# Altium PCB PCB.PcbDoc
Units mm, origin at the board's own origin, x right, y up, seen from the top; angles counter-clockwise.
Board outline 71.43 x 50.9 mm, 2 copper layers (Top Layer, Bottom Layer); 47 components, 48 nets, 194 pads, 63 vias.
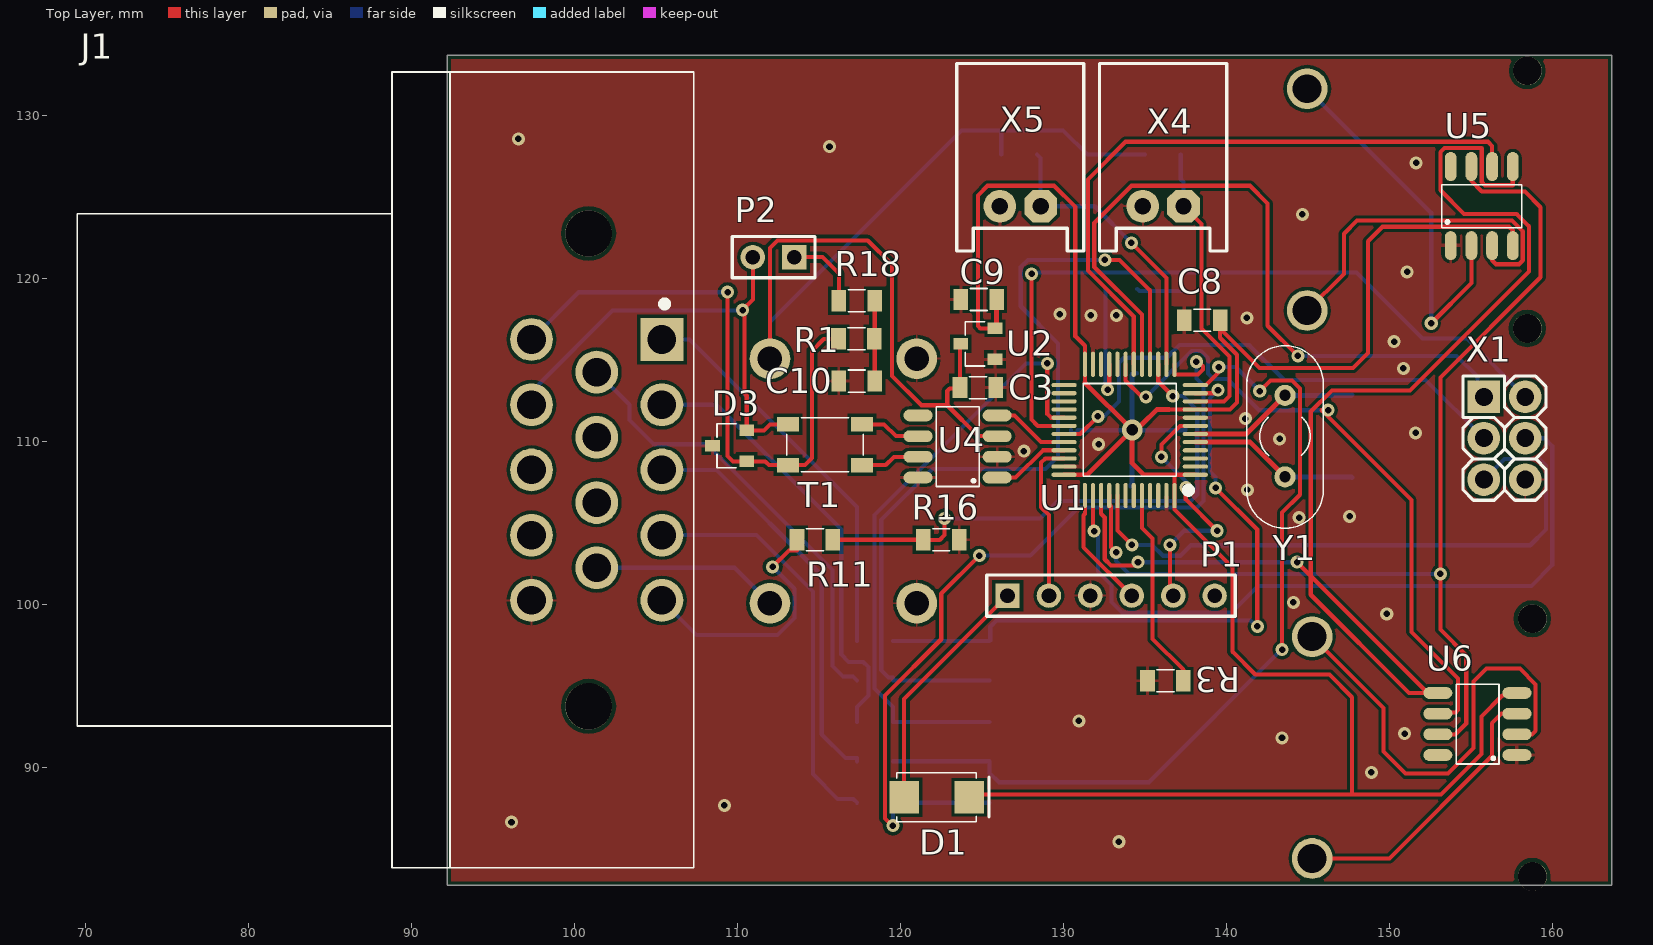
[diagram p0: Top Layer view]
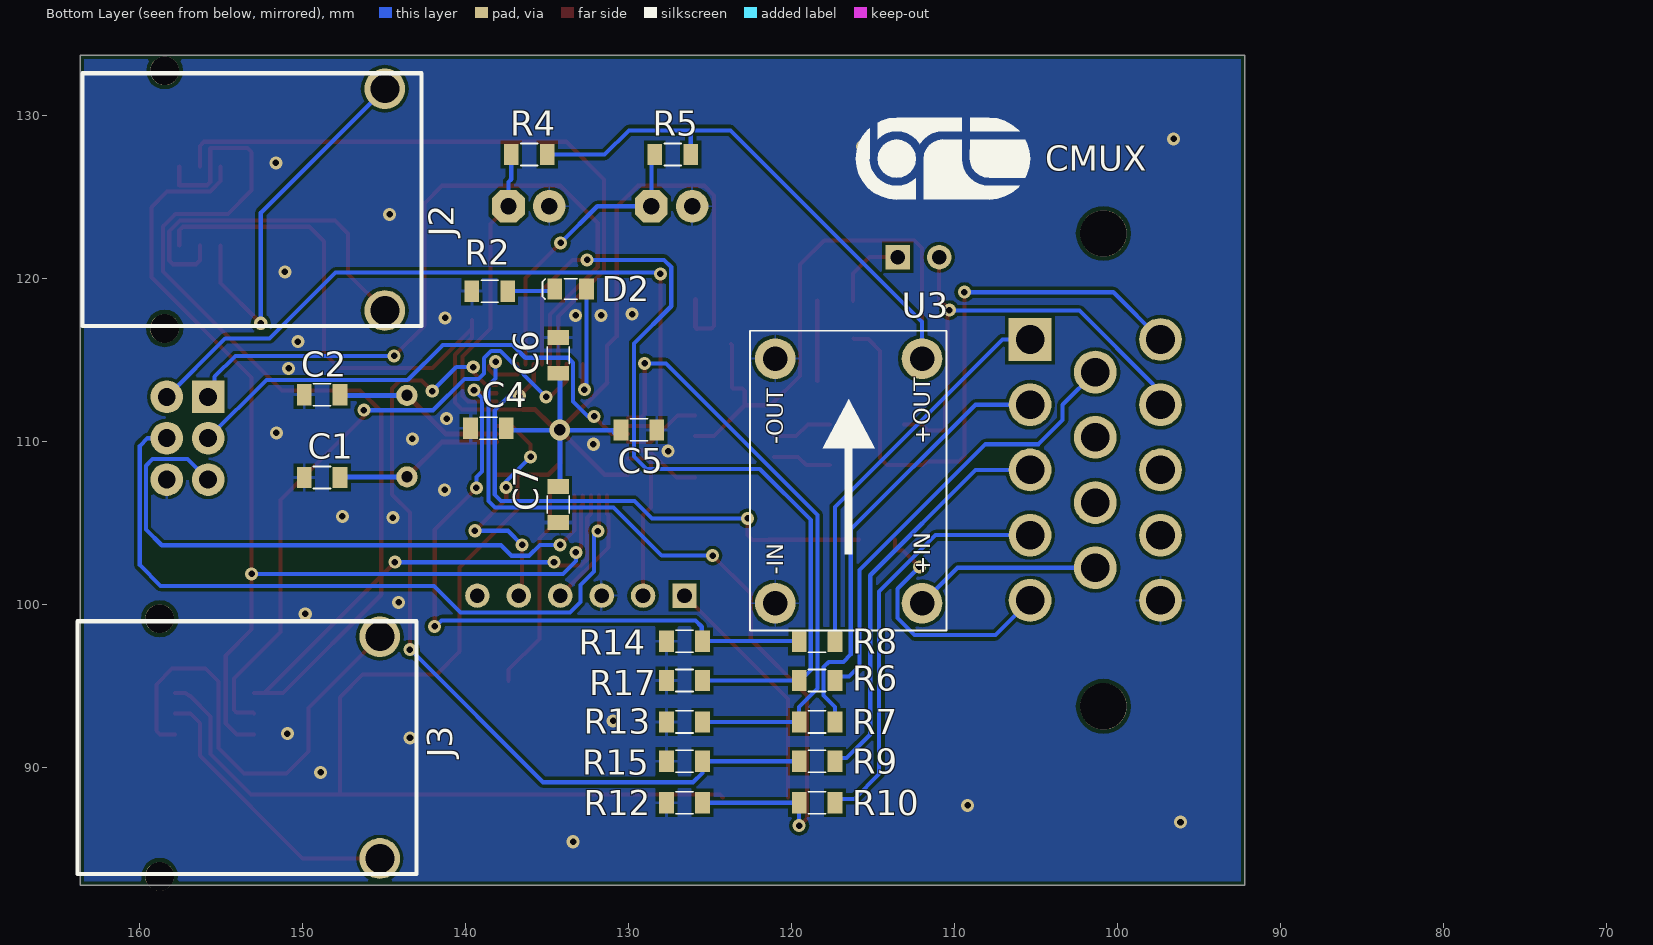
[diagram p1: Bottom Layer view, seen from below]

## Layer stack, top to bottom
Top Solder: solder mask 0.0102, Solder Resist, Dk 3.5
Top Layer: signal copper 0.0356
Dielectric 1: dielectric 0.32, FR-4, Dk 4.8
Bottom Layer: signal copper 0.0356
Bottom Solder: solder mask 0.0102, Solder Resist, Dk 3.5

## Board outline
92.2,82.775 92.2,133.675 163.625,133.675 163.625,82.775

## Design rules (kind name [scope] priority, off if disabled: settings)
AcuteAngle [All] p1: minimum=3.50000000000000E+0001 checktracksonly=FALSE
BoardOutlineClearance "BoardOutlineClearance 1" [All] p1: gap=0.25 ignorepadtopadclearanceinfootprint=FALSE except(0: Arc-SplitContinuation Track-SplitContinuation SMDPad-SplitContinuation THPad-SplitContinuation Via-SplitContinuation Fill-SplitContinuation Poly-SplitContinuation Region-SplitContinuation Text-SplitContinuation) // Milling
Clearance "Clearance-1 1/2 Oz" [All] p1: gap=0.125 ignorepadtopadclearanceinfootprint=FALSE except(0.2: Arc-Fill Arc-Poly Track-Fill Track-Poly SMDPad-SMDPad SMDPad-Fill SMDPad-Poly THPad-Fill THPad-Poly Via-Fill Via-Poly Fill-Fill Fill-Poly Poly-Poly Poly-Region Poly-Text; 0.25: Arc-Hole Track-Hole SMDPad-Hole THPad-Hole Via-Hole Fill-Hole Poly-Hole Region-Hole Text-Hole) // Standart
ComponentClearance [All] p1: gap=0.1 collisioncheckmode=3 verticalgap=0.25 showdistances=FALSE
DiffPairsRouting "DiffPairsRouting 1/2 Oz" [All] p1: maxlimit=0.254 minlimit=0.125 mostfreqgap=0.254 toplayer_minwidth=0.125 toplayer_maxwidth=0.381 toplayer_prefwidth=0.381 bottomlayer_minwidth=0.125 bottomlayer_maxwidth=0.381 bottomlayer_prefwidth=0.381 maxuncoupledlength=12.7
Height [All] p1: minheight=0 maxheight=100 prefheight=12.7
HoleSize "Minimum HoleSize" [IsPad] p1: absolutevalues=TRUE maxlimit=5.9 minlimit=0.6 maxpercent=80.000 minpercent=20.000
HoleSize "Minimum HoleSize VIA 1" [IsVia] p2: absolutevalues=TRUE maxlimit=5.9 minlimit=0.3 maxpercent=80.000 minpercent=20.000 // Standart
HoleToHoleClearance Hole2HoleClearance [All] p1: gap=0.25 allowstackedmicrovias=FALSE
MinimumAnnularRing "Minimum AR VIA Standart" [All] p1: minimumring=0.15
MinimumAnnularRing "Minimum AR PAD Standart" [All] p2: minimumring=0.2
MinimumSolderMaskSliver "SolderMask Bridge Standart" [All] p1: minsoldermaskwidth=0.15 // All Masks
PlaneClearance "PlaneClearance-1 1/2 Oz" [All] p1: clearance=0.2 // Standart
PlaneConnect "TermalConnect-1 1/2 Oz" [All] p1: planeconnectstyle=Relief reliefexpansion=0.2 reliefentries=4 reliefconductorwidth=0.2 reliefairgap=0.2 // Standart
PolygonConnect "PolygonConnect-1 1/2 Oz" [All] p1: thpad.connectstyle=Relief thpad.reliefconductorwidth=0.15 thpad.reliefentries=4 thpad.polygonreliefangle="90 Angle" thpad.airgapwidth=0.2 smdpad.connectstyle=Relief smdpad.reliefconductorwidth=0.2 smdpad.reliefentries=4 smdpad.polygonreliefangle="90 Angle" smdpad.airgapwidth=0.2 via.connectstyle=Direct via.reliefconductorwidth=0.254 via.reliefentries=4 via.polygonreliefangle="90 Angle" via.airgapwidth=0.254 // Standart
RoutingCorners [All] p1 off: cornerstyle=45-Degree minsetback=2.54 maxsetback=2.54
RoutingVias [All] p1: holewidth=0.4 width=0.8 viastyle="Through Hole" minholewidth=0.3 minwidth=0.6 maxholewidth=5.9 maxwidth=8.9
SilkToSilkClearance Silk2SilkClearance [All] p1 off: silktosilkclearance=0.15
SilkToSolderMaskClearance Silk2SolderMaskClearance [IsPad] p1 off: minsilkscreentomaskgap=0.15 clearancetoexposedcopper=TRUE
SolderMaskExpansion SolderMaskExpansion-1 [All] p1: expansion=0.05 istentingtop=FALSE // Standart
UnRoutedNet [All] p1: checkbadconnections=TRUE
Width "Width 1/2 Oz" [All] p1: maxlimit=10 minlimit=0.125 preferedwidth=0.254 checkconnectedcopper=TRUE
18 further rules are at their usual default settings.

## Classes and differential pairs
component class "Power and can": C3 C4 C5 C6 C7 C8 C9 C10 D3 J2 J3 P2 R1 R18 T1 U2 U3 U4 U5 U6
component class "STM and connectors": C1 C2 D1 D2 J1 P1 R2 R3 R4 R5 R6 R7 R8 R9 R10 R11 R12 R13 R14 R15 R16 R17 U1 X1 X4 X5 Y1

## Components (designator, comment, footprint, x,y, rotation, side; value= is the part's Value field where it differs from the comment)
C1 "10pF" "0805 Capicator" 148.792,107.783 r0 bottom
C2 "10pF" "0805 Capicator" 148.792,112.863 r0 bottom
C3 "1uF" "0805 Capicator" 124.75,113.3 r180 top
C4 "0.1uF" "0805 Capicator" 138.589,110.81 r0 bottom
C5 "0.1uF" "0805 Capicator" 129.361,110.704 r180 bottom
C6 "0.1uF" "0805 Capicator" 134.314,115.276 r90 bottom
C7 "0.1uF" "0805 Capicator" 134.314,106.132 r270 bottom
C8 "4.7uF" "0805 Capicator" 138.505,117.435 r0 top
C9 "1uF" "0805 Capicator" 124.8,118.7 r180 top
C10 "4.7uF" "0805 Capicator" 117.325,113.7 r0 top
D1 "Diode" SMA 122.225,88.175 r0 top
D2 "LedG" "0805 LED" 133.552,119.34 r0 bottom
D3 "TVS" SOT-23 110.575,108.775 r90 top
J1 "Connector" "AMP 776266-1" 105.436,116.231 r270 top
J2 "PCC-SMP-K" thermocouple 142.444,124.827 r90 bottom
J3 "PCC-SMP-K" thermocouple 142.75,91.225 r90 bottom
P1 "Header 6" HDR1X6 126.567,100.544 r0 top
P2 "Header 2" HDR1X2 113.49,121.3 r180 top
R1 "62R" "0805 Resistor" 117.3,116.3 r180 top
R2 "430R" "0805 Resistor" 138.505,119.213 r0 bottom
R3 "1k" "0805 Resistor" 136.25,95.325 r180 top
R4 "1k" "0805 Resistor" 136.092,127.595 r180 bottom
R5 "1k" "0805 Resistor" 127.286,127.595 r180 bottom
R6 "1k" "0805 Resistor" 118.439,95.337 r180 bottom
R7 "1k" "0805 Resistor" 118.439,92.797 r180 bottom
R8 "1k" "0805 Resistor" 118.439,97.75 r180 bottom
R9 "1k" "0805 Resistor" 118.439,90.384 r180 bottom
R10 "1k" "0805 Resistor" 118.439,87.844 r180 bottom
R11 "1k" "0805 Resistor" 114.756,103.973 r180 top
R12 "2k4" "0805 Resistor" 126.567,87.844 r0 bottom
R13 "2k4" "0805 Resistor" 126.567,92.797 r0 bottom
R14 "2k4" "0805 Resistor" 126.567,97.75 r0 bottom
R15 "2k4" "0805 Resistor" 126.567,90.384 r0 bottom
R16 "2k4" "0805 Resistor" 122.503,103.973 r0 top
R17 "2k4" "0805 Resistor" 126.567,95.337 r0 bottom
R18 "62R" "0805 Resistor" 117.325,118.625 r0 top
T1 "ACT45B" ACT45B 118.33,111.045 r180 top
U1 "STM32F103C8T6" LQFP48 134.06,110.704 r180 top
U2 "LDO 3V" SOT-23 125.805,115.027 r90 top
U3 "DC/DC" DC-DC 116.5,107.575 r90 bottom
U4 "CAN_Rx/Tx" SO-8#1 125.932,107.783 r180 top
U5 "MAX31855KASA+" SO-8#2 153.725,122.066 r90 top
U6 "MAX31855KASA+" SO-8#2 157.75,90.745 r180 top
X1 "Connector, 6pin, 2.54mm, 500VAC, 3A" "CON: PLD-6" 157.047,110.196 r270 top
X4 "Connector, 2pin, 2.54mm, 250VAC, 3A" "CON: CWF-2R" 136.112,124.42 r180 top
X5 "Connector, 2pin, 2.54mm, 250VAC, 3A" "CON: CWF-2R" 127.349,124.42 r180 top
Y1 "8MHz" R38 143.585,110.323 r0 top

## Footprints (in the part's own frame and the unit in brackets; to place one, negate y for a bottom-side part, rotate by r counter-clockwise, add the part's x,y. Pads: shape width x height; smd on the part's side, far side on the other; paste and mask are expansions set on the pad)
"0805 Capicator" [mm]
  rect 0.9x1.3 smd: 1(-1.1,0) 2(1.1,0)
  silkscreen extent -0.53,-0.67 0.53,0.67, body extent -1.05,-0.67 1.05,0.68, height 0.75
"0805 LED" [mm]
  rect 0.9x1.3 smd: 1(-0.975,0) 2(0.975,0)
  silkscreen extent -0.4,-0.63 1.73,0.63, body extent -0.93,-0.62 1.09,0.63, height 1.1
"0805 Resistor" [mm]
  rect 0.9x1.3 smd: 1(-1.1,0) 2(1.1,0)
  silkscreen extent -0.53,-0.67 0.53,0.67, body extent -1.05,-0.67 1.05,0.68, height 0.6
ACT45B [mm]
  rect 1.35x0.9 smd: 1(0.675,2.5) 2(0.675,0) 3(5.225,0) 4(5.225,2.5)
  silkscreen extent 0.6,-0.4 5.3,2.9, body extent 0.7,-0.35 5.2,2.85, height 3
"AMP 776266-1" [mm]
  rect 2.625x2.625 hole 1.75: 1(-0.019,-0.061)
  round 2.625 hole 1.75: 2(3.981,-0.061) 3(7.981,-0.061) 4(11.981,-0.061) 5(15.981,-0.061) 6(1.981,-4.061) 7(5.981,-4.061) 8(9.981,-4.061) 9(13.981,-4.061) 10(-0.019,-8.061) 11(3.981,-8.061) 12(7.981,-8.061) 13(11.981,-8.061) 14(15.981,-8.061)
  round 2.85 hole 2.85 unplated: None(-6.519,-4.561) None(22.481,-4.561)
  silkscreen extent -16.42,-35.91 32.38,1.9, body extent -16.4,-35.9 32.4,1.9, height 29.05
"CON: CWF-2R" [mm]
  oct 2x2 hole 1: 1(-1.25,0)
  round 2 hole 1: 2(1.25,0)
  round 0.5 on Mech1: ""(-3.3,2.2)
  round 0.5 on Top Overlay: ""(-2.375,1.85)
  silkscreen extent -3.9,-8.75 3.9,2.75, body extent -3.75,-8.9 3.75,2.6, height 5.75
"CON: PLD-6" [mm]
  rect 2x2 hole 1.1: 1(-2.54,-1.27)
  round 2 hole 1.1: 2(-2.54,1.27) 3(0,-1.27) 4(0,1.27) 5(2.54,-1.27) 6(2.54,1.27)
  silkscreen extent -3.81,-2.54 3.81,2.54, body extent -3.81,-2.54 3.81,2.54, height 8.54
DC-DC [mm]
  round 2.5 / inner round 1.524 / far side round 2.5 hole 1.5: 1(-7.5,4.5) 2(-7.5,-4.5) 3(7.5,4.5) 4(7.5,-4.5)
  silkscreen extent -9.18,-6 9.2,6.05, body extent -9,-5.82 9,5.82, height 7.3
HDR1X2 [mm] "Connector; Header; 2 Position"
  rect 1.5x1.5 hole 0.9: 1(0,0)
  round 1.5 hole 0.9: 2(2.54,0)
  silkscreen extent -1.27,-1.27 3.81,1.27
HDR1X6 [mm] "Connector; Header; 6 Position"
  rect 1.5x1.5 hole 0.9: 1(0,0)
  round 1.5 hole 0.9: 2(2.54,0) 3(5.08,0) 4(7.62,0) 5(10.16,0) 6(12.7,0)
  silkscreen extent -1.27,-1.27 13.97,1.27
LQFP48 [mm]
  oval 1.55x0.254 smd mask+0.02: 1(-4.025,2.75) 2(-4.025,2.25) 3(-4.025,1.75) 4(-4.025,1.25) 5(-4.025,0.75) 6(-4.025,0.25) 7(-4.025,-0.25) 8(-4.025,-0.75) 9(-4.025,-1.25) 10(-4.025,-1.75) 11(-4.025,-2.25) 12(-4.025,-2.75) 25(4.025,-2.75) 26(4.025,-2.25) 27(4.025,-1.75) 28(4.025,-1.25) 29(4.025,-0.75) 30(4.025,-0.25) 31(4.025,0.25) 32(4.025,0.75) 33(4.025,1.25) 34(4.025,1.75) 35(4.025,2.25) 36(4.025,2.75)
  oval 0.254x1.55 smd mask+0.02: 13(-2.75,-4.025) 14(-2.25,-4.025) 15(-1.75,-4.025) 16(-1.25,-4.025) 17(-0.75,-4.025) 18(-0.25,-4.025) 19(0.25,-4.025) 20(0.75,-4.025) 21(1.25,-4.025) 22(1.75,-4.025) 23(2.25,-4.025) 24(2.75,-4.025) 37(2.75,4.025) 38(2.25,4.025) 39(1.75,4.025) 40(1.25,4.025) 41(0.75,4.025) 42(0.25,4.025) 43(-0.25,4.025) 44(-0.75,4.025) 45(-1.25,4.025) 46(-1.75,4.025) 47(-2.25,4.025) 48(-2.75,4.025)
  silkscreen extent -3.8,-2.85 2.85,3.9, body extent -4.5,-4.54 4.5,4.46, height 1.56
R38 [mm] "Crystal"
  round 1.3 hole 0.7: 1(0,2.5) 2(0,-2.5)
  silkscreen extent -2.35,-5.65 2.35,5.55, body extent -2.26,-5.56 2.24,5.44, height 4
SMA [mm]
  rect 1.8x2 smd: 1(-2,0) 2(2,0)
  silkscreen extent -2.45,-1.5 3.2,1.5, body extent -2.74,-1.4 2.74,1.4, height 2.29
SO-8#1 [mm]
  oval 1.78x0.72 smd: 1(0,0) 2(0,-1.27) 3(0,-2.54) 4(0,-3.81) 5(4.85,-3.81) 6(4.85,-2.54) 7(4.85,-1.27) 8(4.85,0)
  silkscreen extent 1.1,-4.35 3.72,0.55, body extent -0.45,-4.35 5.33,0.55, height 1.45
SO-8#2 [mm]
  oval 1.78x0.72 smd: 1(-0.059,-0.02) 2(-0.059,-1.29) 3(-0.059,-2.56) 4(-0.059,-3.83) 5(4.791,-3.83) 6(4.791,-2.56) 7(4.791,-1.29) 8(4.791,-0.02)
  silkscreen extent 1.04,-4.37 3.67,0.53, body extent -0.51,-4.37 5.27,0.53, height 1.45
SOT-23 [mm]
  rect 0.7x0.9 smd: 1(0,0) 2(1.9,0) 3(0.95,2.1)
  silkscreen extent -0.4,0.65 2.3,1.83, body extent -0.55,-0.17 2.45,2.23, height 1.1
thermocouple [mm]
  round 2.5 / inner round 1.524 / far side round 2.5 hole 1.77: +(-6.8,2.5) -(6.8,2.5)
  round 1.77 hole 1.77: ""(-7.9,16) ""(7.9,16)
  silkscreen extent -7.75,0.25 7.75,21.05, body extent -7.85,-0.02 7.85,20.78, height 7.47

## Part data
C1 C2: library part "Cap 10pF (0805)", "10pF NP0 50V 5% 0805", Manufacturer="Murata Manufacturing", Part Number=GRM2165C1H100JZ01D, ComponentLink1Description=Chip&Dip, ComponentLink1URL=https://www.chipdip.ru/product/grm2165c1h100j, Type=Capacitor
C3 C9: library part "Cap 1uF (0805)", "1uF X7R 10% 16V 0805", Manufacturer="Murata Manufacturing", Part Number=GRM21BR71C105KA01K, ComponentLink1Description=Chip&Dip, ComponentLink1URL=https://www.chipdip.ru/product/grm21br71c105k, Type=Capacitor
C4 C5 C6 C7: library part "Cap 0.1uF (0805)", "0.1uF X7R 50V 10% 0805", Manufacturer="Murata Manufacturing", Part Number=GRM21BR71H104K, ComponentLink1Description=Chip&Dip, ComponentLink1URL=https://www.chipdip.ru/product/grm21br71h104k, Type=Capacitor
C8 C10: library part "Cap 4.7uF (0805)", "4.7uF X5R 10% 25V 0805", Manufacturer="Murata Manufacturing", Part Number=GRM21BR61E475KA12L, ComponentLink1Description=Chip&Dip, ComponentLink1URL=https://www.chipdip.ru/product/grm21br61e475ka12l, Type=Capacitor
D1: library part "Diode Schottky (SMA)", "Diode Schottky 3A 40V", Manufacturer=Vishay, Part Number=B340A-E3/61T, ComponentLink1Description=DataSheet, ComponentLink1URL=https://static.chipdip.ru/lib/652/DOC001652710.pdf, ComponentLink2Description=Chip&Dip, ComponentLink2URL=https://www.chipdip.ru/product/b340a-e3-61t-2, Type=Diode
D2: library part "Led Green", "Led Green SMD 1608, 120°, 525nM", Manufacturer="Taiwan Oasis Technology", Part Number=TO-1608BC-PG, ComponentLink1Description=Chip&Dip, ComponentLink1URL=https://www.chipdip.ru/product/to-1608bc-pg, Type=Diode
D3: library part "TVS Diode Arrays", Manufacturer=Littelfuse, Part Number=SM24CANB-02HTG, ComponentLink1Description=DataSheet, ComponentLink1URL=https://m.littelfuse.com/~/media/electronics/datasheets/tvs_diode_arrays/littelfuse_tvs_diode_array_sm24canb_datasheet.pdf.pdf, ComponentLink2Description=Chip&Dip, ComponentLink2URL=https://www.chipdip.ru/product1/8001779022, Type=Diode
J1: library part "Connector AMP", "AMP Connector", Manufacturer="TE Connectivity", Part Number=776266-1, Type=Connector
J2 J3: library part thermocoupleconnector
P1: "Header, 6-Pin", LatestRevisionDate=17-Jul-2002, LatestRevisionNote="Re-released for DXP Platform.", Publisher="Altium Limited"
P2: "Header, 2-Pin", LatestRevisionDate=17-Jul-2002, LatestRevisionNote="Re-released for DXP Platform.", Publisher="Altium Limited"
R1 R18: library part "Res 62R (0805)", "0.125W 0805 62R, 1%", Manufacturer=Taiwan, Part Number=RC0805FR-0762RL, ComponentLink1Description=Chip&Dip, ComponentLink1URL=https://www.chipdip.ru/product0/9000079457, Type=Resistor
R2: library part "Res 430R (0805)", "0.125W 0805 430R, 1%", Manufacturer=Taiwan, Part Number=RC0805FR-07430RL, ComponentLink1Description=Chip&Dip, ComponentLink1URL=https://www.chipdip.ru/product0/9000079477, Type=Resistor
R3 R4 R5 R6 R7 R8 R9 R10 R11: library part "Res 1k (0805)", "0.125W 0805 1k, 1%", Manufacturer=Taiwan, Part Number=RC0805FR-071KL, ComponentLink1Description=Chip&Dip, ComponentLink1URL=https://www.chipdip.ru/product0/9000079486, Type=Resistor
R12 R13 R14 R15 R16 R17: library part "Res 2.4k (0805)", "0.125W 0805 2.4k, 1%", Manufacturer=Taiwan, Part Number=RC0805FR-072K4L, ComponentLink1Description=Chip&Dip, ComponentLink1URL=https://www.chipdip.ru/product0/9000079495, Type=Resistor
T1: "Common mode filters / Automotive signal line (for power train/safety)", Manufacturer="EMC Components", Part Number=ACT45B-510-2P-TL003, ComponentLink1Description=DataSheet, ComponentLink1URL=https://product.tdk.com/info/en/catalog/datasheets/cmf_automotive_signal_act45b_en.pdf, Type=Inductor
U1: "Cortex™-M3 32-bit RISC core operating at a 72 MHz frequency", Manufacturer=STMicroelectronics, ComponentLink1Description=DataSheet, ComponentLink1URL=https://static.chipdip.ru/lib/235/DOC000235733.pdf, ComponentLink2Description=Chip&Dip, ComponentLink2URL=https://www.chipdip.ru/product/stm32f103c8t6, Part Number=STM32F103C8T6, Type=IC
U2: library part "LDO 3V [MCP]", "MCP1702 Low Dropout Voltage Regulator. The input operating range is specifiedfrom 2.7V to 13.2V", Manufacturer=Microchip, Part Number=MCP1702T-3002E/CB, ComponentLink1Description=DataSheet, ComponentLink1URL=https://static.chipdip.ru/lib/986/DOC003986671.pdf, ComponentLink2Description=Chip&Dip, ComponentLink2URL=https://www.chipdip.ru/product/mcp1702t-3002e-cb-microchip
U3: "DC/DC 5V with MP2307 Chip"
U4: library part "CAN Transceiver [MCP2551]", "High-speed  CAN,  fault-tolerantdevice  that  serves  as  the  interface  between  a  CANprotocol controller and the physical bus.", Manufacturer=Microchip, Part Number=MCP2551-I/SN, ComponentLink1Description=DataSheet, ComponentLink1URL=https://static.chipdip.ru/lib/204/DOC000204457.pdf, ComponentLink2Description=Chip&Dip, ComponentLink2URL=https://www.chipdip.ru/product/mcp2551-i-sn, Type=IC
X1: library part PLD-6, CurrentMax=3A, Manufacturer=Connfly, VoltageMax=500VAC, CommentText="\"Разъем\"", HelpURL=https://www.chipdip.ru/product/pld-6, Multichannel=6pin, PartNumber=PLD-6, Pitch=2.54mm, TypeConnector=Connector, ValueManufacturerPartNumber="Connector, 6pin, 2.54mm, 500VAC, 3A"
X4 X5: library part CWF-2R, CurrentMax=3A, Manufacturer=Connfly, VoltageMax=250VAC, CommentText="\"CWF-2R\"", ComponentLink1Description=CHIP&DIP, ComponentLink1URL=https://www.chipdip.ru/product/cwf-2r-ds1069-2-mr, HelpURL=https://www.chipdip.ru/product/cwf-2r-ds1069-2-mr, Multichannel=2pin, PartNumber=CWF-2R, Pitch=2.54mm, TypeConnector=Connector, ValueManufacturerPartNumber="Connector, 2pin, 2.54mm, 250VAC, 3A"
Y1: library part "Crystal 8MHz", "Crystal. HC-49S (US)", Manufacturer=China, Part Number=8.000MHzHC-49US, ComponentLink1Description=Chip&Dip, ComponentLink1URL=https://www.chipdip.ru/product/8mhz-hc-49s, Type=Crystal
U5 U6: ComponentLink1Description=CHIP&DIP, ComponentLink1URL=https://www.chipdip.ru/product/max31855kasa, ComponentLink2Description=Datasheet, ComponentLink2URL=https://static.chipdip.ru/lib/121/DOC001121138.pdf

## Via types
v1: diameter 0.8, hole 0.4, Top Layer to Bottom Layer, 61 vias
v2: diameter 0.8, hole 0.4, Top Layer to Bottom Layer, tented both sides, 1 vias
v3: diameter 1.27, hole 0.711, Top Layer to Bottom Layer, 1 vias

## Nets (pads, with @x,y where several pads share a name; then routed paths per layer and width w, separated by ;. In a path a pad name is that pad's centre, name@x,y a point inside that pad or via, vN(x,y) a via of type N, cw(c..) or ccw(c..) an arc to the next point about the centre after c; other vN are vias at no path point)
3.3V: C4.1 C5.1 C6.1 C7.1 C8.2 C9.1 D1.2 U1.1 U1.9 U1.24 U1.36 U1.48 U2.2 U5.4 U6.4 | length 164
  Top Layer w0.254: D1.2 124.4,88.35 147.7,88.35 ; U2.2 124.899,116.927 124.75,117.076 124.75,125.08 125.349,125.679 129.427,125.679 130.725,124.382 130.725,116.45 131.31,115.865 U1.24 131.31,113.602 ; U1.36 131.458,107.954 ; 136.475,111.95 138.081,111.95 U1.9 140.208,111.954 140.65,112.396 140.65,115.312 139.605,116.357 C8.2@139.605,116.916 ; U1.1 136.81,107.954 U1.48 136.81,105.816 140.36,102.266 140.36,97.104 141.757,95.707 146.304,95.707 147.7,94.311 147.7,88.35 ; C8.2 C8.2@139.605,116.916 ; U5.4 157.555,122.936 157.326,123.165 149.555,123.165 148.666,122.276 148.666,115.418 147.748,114.499 142.022,114.499 C8.2@139.605,116.916 ; U6.4 157.153,94.575 156.986,94.408 156.906,94.408 155.625,93.126 155.625,90.829 153.146,88.35 147.7,88.35
  Top Layer w0.3: U2.2 125.9,117.022 C9.1 ; 131.31,113.602 v3(134.208,110.704) ; 131.458,107.954 v3(134.208,110.704) ; v3@134.345,110.579 134.802,111.036 134.811,111.036 135.725,111.95 136.475,111.95 ; 136.81,107.954 134.922,107.954 134.208,108.668 134.208,110.57 v3(134.208,110.704)
  Bottom Layer w0.254: C5.1 130.461,110.515 130.876,110.515 130.876,110.686 137.471,110.686 C4.1 ; C7.1@134.208,107.338 134.112,107.338 134.112,107.232 C7.1 ; C6.1@134.208,114.07 134.208,114.173 134.493,114.173 134.493,114.176 C6.1
  Bottom Layer w0.3: C7.1@134.208,107.338 v3(134.208,110.704) C6.1@134.208,114.07
5V: C3.2 R4.2 R5.2 U2.3 U3.4 U4.3 | length 66.5
  Top Layer w0.254: U3.4 112,121.855 112.471,122.326 117.999,122.326 119.482,120.843 119.482,114.018 121.283,112.217 122.871,112.217 ; U2.3 123.65,115.922 C3.2 123.6,113.25 123.025,113.25 122.871,113.096 122.871,112.217 ; U4.3 124.765,110.323 122.871,112.217
  Bottom Layer w0.254: U3.4 112,117.334 123.741,129.075 126.186,129.075 ; R5.2 126.186,129.075 ; R4.2 134.992,127.584 131.47,127.584 129.98,129.075 126.186,129.075
12V: J1.9 U3.2 | length 11.5
  Bottom Layer w0.254: J1.9 109.825,102.25 U3.2
ADC1_3V: R8.1 R14.1 U1.11 | length 40.9
  Top Layer w0.254: U1.11 139.268,112.954 139.464,113.15 v1(139.475,113.15) ; v1(139.325,107.15) 141.884,104.591 v1(141.884,98.654)
  Bottom Layer w0.254: R8.1 R14.1 125.507,97.79 125.507,98.632 125.9,99.025 141.463,99.025 141.834,98.654 v1(141.884,98.654) ; v1(139.325,107.15) 139.325,107.817 138.987,108.155 138.987,112.662 v1(139.475,113.15)
ADC1_5V: J1.1 R8.2 | length 24.5
  Bottom Layer w0.254: J1.1 107.075,116.25 117.339,105.986 R8.2
ADC2_3V: R9.1 R15.1 U1.12 | length 53
  Top Layer w0.254: U1.12 138.735,113.454 139.7,114.419 139.565,114.554 v1(139.522,114.554) ; v1(142.037,113.081) 142.697,113.741 144.01,113.741 144.501,113.25 144.501,106.731 143.408,105.639 v1(143.408,97.231)
  Bottom Layer w0.254: R9.1 R15.1 125.467,89.671 126.038,89.1 135.25,89.1 143.381,97.231 v1(143.408,97.231) ; v1(139.522,114.554) 140.564,114.554 v1(142.037,113.081)
ADC2_5V: J1.3 R9.2 | length 25.2
  Bottom Layer w0.254: J1.3 108.717,108.25 115.175,101.792 115.175,92.038 116.637,90.576 117.339,90.576 R9.2
ADC3_3V: R10.1 R12.1 U1.13 | length 53.6
  Top Layer w0.254: v1(119.539,86.436) 119.482,86.436 119.05,86.868 119.05,94.412 122.504,97.866 122.504,100.66 v1(124.841,102.997) ; U1.13 136.81,114.097 138.252,114.097 138.557,114.402 138.557,114.605 138.278,114.884 v1(138.151,114.884)
  Bottom Layer w0.254: v1(119.539,86.436) R10.1 R12.1 ; v1(124.841,102.997) 127.965,102.997 130.912,105.943 138.176,105.943 138.584,106.352 138.584,113.416 138.151,113.849 v1(138.151,114.884)
ADC3_5V: J1.4 R10.2 | length 25.3
  Bottom Layer w0.254: J1.4 111.167,104.25 114.63,100.787 114.63,89.595 116.15,88.075 117.108,88.075 R10.2
ADC4_3V: R11.1 R16.1 U1.15 | length 33.5
  Top Layer w0.254: R11.1 R16.1 121.403,103.962 122.412,103.962 122.7,104.25 v1(122.7,105.275) ; U1.15@135.81,114.729 135.81,113.665 v1(136.699,112.776)
  Bottom Layer w0.254: v1(122.7,105.275) 128.567,105.275 129.642,106.35 137.82,106.35 138.205,106.735 138.205,111.892 137.322,112.776 v1(136.699,112.776)
ADC4_5V: J1.5 R11.2 | length 15.7
  Top Layer w0.254: v1(112.166,102.311) 113.173,103.318 113.656,103.318 R11.2
  Bottom Layer w0.254: J1.5@105.375,100.25 107.505,98.12 112.471,98.12 113.513,99.162 113.513,100.965 v1(112.166,102.311)
ADC5_3V: R6.1 R17.1 U1.16 | length 54.7
  Top Layer w0.254: v1(132.537,121.133) 133.443,121.133 135.31,119.266 U1.16
  Bottom Layer w0.254: R17.1 R6.1 119.539,95.529 119.278,95.529 118.821,95.987 118.821,105.171 121.95,108.3 128.9,108.3 129.667,109.067 129.667,116.002 127.381,118.288 127.381,120.701 127.813,121.133 v1(132.537,121.133)
ADC5_5V: J1.6 R6.2 | length 27.8
  Bottom Layer w0.254: J1.6 103.378,112.247 103.378,111.303 104.851,109.83 108.102,109.83 115.825,102.107 115.825,96.225 116.475,95.575 117.101,95.575 R6.2
GND: C1.2 C2.2 C3.1 C4.2 C5.2 C6.2 C7.2 C8.1 C9.2 C10.1 D3.3 J1.14 P1.3 R2.2 R3.2 R12.2 R13.2 R14.2 R15.2 R16.2 R17.2 U1.8 U1.23 U1.35 U1.47 U2.1 U3.1 U3.3 U4.2 U4.8 U5.1 U6.1 X1.6 X4.2 X5.2
  other v1: 133.4,85.45 96.15,86.65 109.2,87.675 148.875,89.7 143.4,91.825 150.925,92.075 130.943,92.856 149.825,99.425 144.1,100.125 144.45,105.325 147.55,105.4 141.275,107.025 127.575,109.4 132.15,109.825 143.25,110.15 151.6,110.525 141.15,111.4 150.85,114.475 150.275,116.125 141.25,117.575 131.675,117.725 133.25,117.725 129.775,117.8 151.075,120.4 144.65,123.925 151.625,127.075 115.65,128.075 96.575,128.55
NetC1_1: C1.1 U1.5 Y1.2 | length 10.5
  Top Layer w0.3: U1.5 141.454,109.954 Y1.2
  Bottom Layer w0.3: Y1.2 147.652,107.823 C1.1
NetC2_1: C2.1 U1.6 Y1.1 | length 10.6
  Top Layer w0.3: U1.6 141.216,110.454 Y1.1
  Bottom Layer w0.3: Y1.1 147.652,112.823 C2.1
NetC10_2: C10.2 R1.1 R18.2 | length 4.9
  Top Layer w0.254: C10.2 R18.2
NetD1_1: D1.1 P1.1 | length 15
  Top Layer w0.254: D1.1 120.225,94.202 P1.1
NetD2_1: D2.1 U1.21 | length 7.8
  Top Layer w0.254: v1(132.7,113.175) 132.7,113.323 132.81,113.433 U1.21
  Bottom Layer w0.254: D2.1 132.577,113.298 v1(132.7,113.175)
NetD2_2: D2.2 R2.1 | length 2.9
  Bottom Layer w0.254: D2.2 134.654,119.213 R2.1
NetD3_1: D3.1 J1.10 R1.2 T1.4 | length 37.4
  Top Layer w0.254: v1(109.4,119.15) 109.4,109.103 109.728,108.775 D3.1 111.709,108.775 111.939,108.545 T1.4 114.145,108.545 114.575,108.975 114.575,115.55 115.3,116.275 116.175,116.275 R1.2
  Bottom Layer w0.254: J1.10 100.275,119.15 v1(109.4,119.15)
NetD3_2: D3.2 J1.11 P2.2 T1.3 | length 29.3
  Top Layer w0.254: v1(110.325,118.05) 110.325,118.075 110.95,118.7 P2.2 ; v1@110.439,117.907 110.439,112.937 110.575,112.801 D3.2 111.633,110.675 112.003,111.045 T1.3@113.105,111.045
  Bottom Layer w0.254: J1.11 97.829,112.704 97.829,113.504 102.35,118.025 110.3,118.025 v1(110.325,118.05)
NetP2_1: P2.1 R18.1 | length 4.8
  Top Layer w0.254: P2.1 115.219,121.3 116.225,120.294 R18.1
NetR3_1: R3.1 U1.44 | length 12.4
  Top Layer w0.254: U1.44 134.81,104.695 135.458,104.047 135.458,97.892 137.35,96 R3.1
NetT1_1: T1.1 U4.7 | length 3.6
  Top Layer w0.254: T1.1 119.101,108.545 119.609,109.053 U4.7
NetT1_2: T1.2 U4.6 | length 3.7
  Top Layer w0.254: T1.2@117.655,111.045 118.999,111.045 119.721,110.323 U4.6
NetU1_18: U1.18 U5.6 | length 39.6
  Top Layer w0.254: U1.18 134.31,117.668 131.506,120.472 131.506,126.071 133.814,128.378 156.029,128.378 156.285,128.122 U5.6
NetU1_19: U1.19 U6.6 | length 40.6
  Top Layer w0.254: U1.19 133.81,113.722 134.807,112.725 v1(135.05,112.725) ; v1(146.228,111.912) 145.821,111.912 146.025,111.709 151.333,106.401 151.333,98.317 154.2,95.45 154.2,93.53 154.051,93.382 153.036,93.382 U6.6
  Bottom Layer w0.254: v1(135.05,112.725) 137.861,115.536 138.421,115.536 138.853,115.104 138.853,114.172 139.192,113.833 140.065,113.833 141.986,111.912 v1(146.228,111.912)
NetU1_32: U1.32 U4.4 | length 4.8
  Top Layer w0.254: U4.4 126.989,111.593 128.628,109.954 U1.32
NetU1_33: U1.33 U4.1 | length 4.8
  Top Layer w0.254: U4.1 127.062,107.783 128.733,109.454 U1.33
NetU1_39: U1.39 U5.5 U6.5 | length 85.2
  Top Layer w0.254: U1.39 132.31,105.562 132.532,105.339 132.532,102.773 132.911,102.395 134.373,102.395 v1(134.569,102.591) ; v1(144.323,102.591) 145.161,101.752 ; U6.5 U6.5@152.338,94.575 ; U5.5 157.555,125.705 155.854,125.705 155.651,125.908 155.651,127.974 155.626,127.999 153.374,127.999 153.111,127.737 153.111,125.4 154.566,123.945 157.792,123.945 158.546,123.191 158.546,120.422 151.256,113.132 146.456,113.132 145.161,111.836 145.161,101.752 ; 145.161,101.752 145.161,100.595 151.181,94.575 U6.5@152.338,94.575 ; 145.161,101.752 U6.5@152.338,94.575
  Bottom Layer w0.254: v1(134.569,102.591) v1(144.323,102.591)
NetU1_40: U1.40 U5.7 U6.7 | length 67.1
  Top Layer w0.254: U1.40 132.81,106.02 132.918,106.02 132.918,103.505 v1(133.223,103.2) ; U6.7 154.026,92.035 154.7,92.709 154.7,96.875 153.111,98.464 v1(153.111,101.879) 153.111,113.919 159.258,120.066 159.258,124.358 158.293,125.324 155.651,125.324 155.015,125.96 U5.7
  Bottom Layer w0.254: v1(133.223,103.2) 133.223,102.667 134.01,101.879 v1(153.111,101.879)
NRST: P1.5 U1.7 | length 15.7
  Top Layer w0.254: v1(136,109.05) 136,109.813 137.141,110.954 U1.7 ; v1(136.525,103.657) 136.525,100.746 P1.5 ; v2(137.5,107.175) 137.5,106.442 v1(139.421,104.521)
  Bottom Layer w0.254: v1(136,109.05) 137.5,107.55 v2(137.5,107.175) ; v1(136.525,103.657) 137.389,104.521 v1(139.421,104.521)
PA7: U1.17 X1.1 | length 45
  Top Layer w0.254: U1.17 134.81,117.776 131.885,120.701 131.885,123.402 134.163,125.679 141.427,125.679 142.519,124.587 142.519,117.094 v1(144.374,115.24)
  Bottom Layer w0.254: v1(144.374,115.24) 154.11,115.24 155.382,113.968 155.382,113.131 X1.1
PA9: U1.30 X1.2 | length 44.5
  Top Layer w0.254: v1(128.041,120.269) 128.041,111.335 128.422,110.954 U1.30
  Bottom Layer w0.254: v1(128.041,120.269) 128.122,120.35 147.975,120.35 152.005,116.32 154.733,116.32 X1.2
PA10: U1.31 X1.3 | length 31.8
  Top Layer w0.254: U1.31 131.028,110.454 v1(132.105,111.531)
  Bottom Layer w0.254: v1(132.105,111.531) 132.481,111.531 133.4,112.45 133.4,114.822 133.706,115.128 136.332,115.128 137.12,115.915 141.388,115.915 143.537,113.767 152.206,113.767 X1.3
PA15: U1.38 X1.4 | length 44.6
  Top Layer w0.254: U1.38 131.81,104.562 v1(131.877,104.496)
  Bottom Layer w0.254: v1(131.877,104.496) 132.105,104.267 132.105,102.032 132.95,101.187 132.95,100.146 133.579,99.517 140.31,99.517 141.935,101.143 158.699,101.143 159.969,102.413 159.969,109.728 159.501,110.196 X1.4
PB5: U1.41 X1.5 | length 38.1
  Top Layer w0.254: U1.41 133.31,104.536 v1(134.197,103.649)
  Bottom Layer w0.254: v1(134.197,103.649) 135.433,103.649 136.092,102.99 137.177,102.99 137.819,103.632 158.623,103.632 159.588,104.597 159.588,108.509 159.182,108.915 157.036,108.915 X1.5
STRS_3V: R7.1 R13.1 U1.29 | length 37.7
  Top Layer w0.254: v1(129.007,114.783) 129.007,111.683 129.235,111.454 U1.29
  Bottom Layer w0.254: R13.1 R7.1 119.539,93.719 118.42,94.838 118.42,105.491 127.711,114.783 v1(129.007,114.783)
STRS_5V: J1.2 R7.2 | length 27.5
  Bottom Layer w0.254: J1.2 108.73,112.25 116.375,104.605 116.375,96.925 116.825,96.475 117.721,96.475 118.041,96.155 118.041,94.412 117.339,93.71 R7.2
SWCLK: P1.4 U1.37 | length 7.4
  Top Layer w0.254: U1.37 131.31,105.554 131.225,105.469 131.225,103.506 P1.4
SWDIO: P1.2 U1.34 | length 9.9
  Top Layer w0.254: P1.2 129.107,105.485 128.629,105.963 128.629,108.698 128.885,108.954 U1.34
T1+: J2.+ U5.3 | length 22
  Top Layer w0.254: J2.+ 147.193,120.276 147.193,122.733 148.006,123.546 157.505,123.546 158.167,122.884 158.167,121.107 157.925,120.865 156.527,120.865 156.285,121.107 U5.3
T1-: J2.- U5.2 | length 23.3
  Top Layer w0.254: v1(152.552,117.246) 155.015,119.709 U5.2
  Bottom Layer w0.254: J2.- 152.552,124.019 v1(152.552,117.246)
T2+: J3.+ U6.3 | length 17.4
  Top Layer w0.254: J3.+ 149.987,84.425 156.284,90.722 156.284,92.718 156.87,93.305 U6.3
T2-: J3.- U6.2 | length 28.3
  Top Layer w0.254: J3.- 147.202,96.073 149.625,93.65 149.625,90.975 150.975,89.625 153.575,89.625 155.15,91.2 155.15,95.282 155.931,96.063 157.988,96.063 158.953,95.098 158.953,92.253 158.735,92.035 U6.2
TERM1: R4.1 U1.10 X4.1 | length 18.3
  Top Layer w0.254: X4.1 138.455,123.327 138.455,116.916 140.174,115.197 140.174,112.793 139.835,112.454 U1.10
  Bottom Layer w0.254: R4.1 137.192,126.078 137.362,125.908 X4.1
TERM2: R5.1 U1.14 X5.1 | length 18.1
  Top Layer w0.254: v1(134.163,122.174) 136.31,120.027 U1.14
  Bottom Layer w0.254: R5.1 128.599,127.382 X5.1 131.917,124.42 v1(134.163,122.174)
pads on no net: J1.7 J1.8 J1.12 J1.13 J1.None J2. J3. P1.6 U1.2 U1.3 U1.4 U1.20 U1.22 U1.25 U1.26 U1.27 U1.28 U1.42 U1.43 U1.45 U1.46 U4.5 U5.8 U6.8 X4. X5.

## Polygon pours and split planes (outlines as drawn)
GND on Top Layer "Top " (solid, remove dead copper, pour order 6): 92.2,82.775 92.2,133.675 163.625,133.675 163.625,82.775
GND on Bottom Layer "Bottom" (solid, remove dead copper, pour order 7): 92.2,82.775 92.2,133.675 163.625,133.675 163.625,82.775

## Silkscreen, mask and mechanical layers (free items; w line width, h text height)
Top Overlay:
Bottom Overlay:
  region: 109.553,129.84 109.553,129.007 110.72,129.007 110.72,129.015 111.046,128.983 111.36,128.887 111.65,128.733 111.904,128.524 112.112,128.271 112.136,128.225 112.16,128.271 112.369,128.524 112.622,128.733 112.912,128.887 113.226,128.983 113.553,129.015 113.88,128.983 114.194,128.887 114.483,128.733 114.724,128.535 114.719,129.551 114.72,129.551 114.514,129.661 114.043,129.804 113.553,129.852
  region: 115.219,127.34 115.228,127.34 115.195,127.013 115.1,126.699 114.945,126.41 114.737,126.156 114.483,125.948 114.194,125.793 113.88,125.698 113.553,125.665 113.226,125.698 112.912,125.793 112.622,125.948 112.382,126.145 112.386,124.84 113.553,124.84 113.553,124.828 114.043,124.876 114.514,125.019 114.948,125.251 115.329,125.564 115.642,125.944 115.874,126.379 116.017,126.85 116.065,127.34 116.017,127.83 115.874,128.301 115.642,128.736 115.329,129.116 115.221,129.205
  region: 113.248,128.477 112.964,128.359 112.721,128.172 112.534,127.928 112.416,127.645 112.376,127.34 112.416,127.036 112.534,126.752 112.721,126.508 112.964,126.321 113.248,126.203 113.553,126.163 113.857,126.203 114.141,126.321 114.385,126.508 114.572,126.752 114.689,127.036 114.73,127.34 114.689,127.645 114.572,127.928 114.385,128.172 114.141,128.359 113.857,128.477 113.553,128.517
  region: 105.565,128.301 105.422,127.83 105.374,127.34 105.422,126.85 105.565,126.379 105.675,126.173 107.886,126.173 107.886,126.163 108.191,126.203 108.475,126.321 108.718,126.508 108.905,126.752 109.023,127.036 109.063,127.34 109.053,128.507 105.675,128.507
  region: 109.553,128.507 109.553,127.34 109.561,127.34 109.529,127.013 109.433,126.699 109.279,126.41 109.07,126.156 108.817,125.948 108.527,125.793 108.213,125.698 107.886,125.665 106.023,125.673 106.021,125.672 106.11,125.564 106.491,125.251 106.925,125.019 107.396,124.876 107.886,124.828 111.886,124.84 111.886,127.34 111.896,127.34 111.856,127.645 111.739,127.928 111.552,128.172 111.308,128.359 111.024,128.477 110.72,128.517
  region: 107.396,129.804 106.925,129.661 106.491,129.429 106.11,129.116 106.021,129.008 109.053,129.007 109.053,129.84 107.886,129.84 107.886,129.852
  text "CMUX" at 104.439,126.594 h1.52
Drill Guide:
  lines w0.254: 174.498,69.85 174.625,69.977
Mechanical 13:
  the board outline again, w0.1
Mechanical 15:
  lines w0.1: 163.651,133.056 163.778,133.056

## Text inside footprints (layer, text, board x,y; h text height)
U3: Bottom Overlay "-IN" at 120.5,101.825 h1 r270; Bottom Overlay "+IN" at 111.5,101.825 h1 r270; Bottom Overlay "+OUT" at 111.5,109.825 h1 r270; Bottom Overlay "-OUT" at 120.5,109.825 h1 r270